# EAGLE board FET-Driver-Modul (EAGLE 7.5.0)
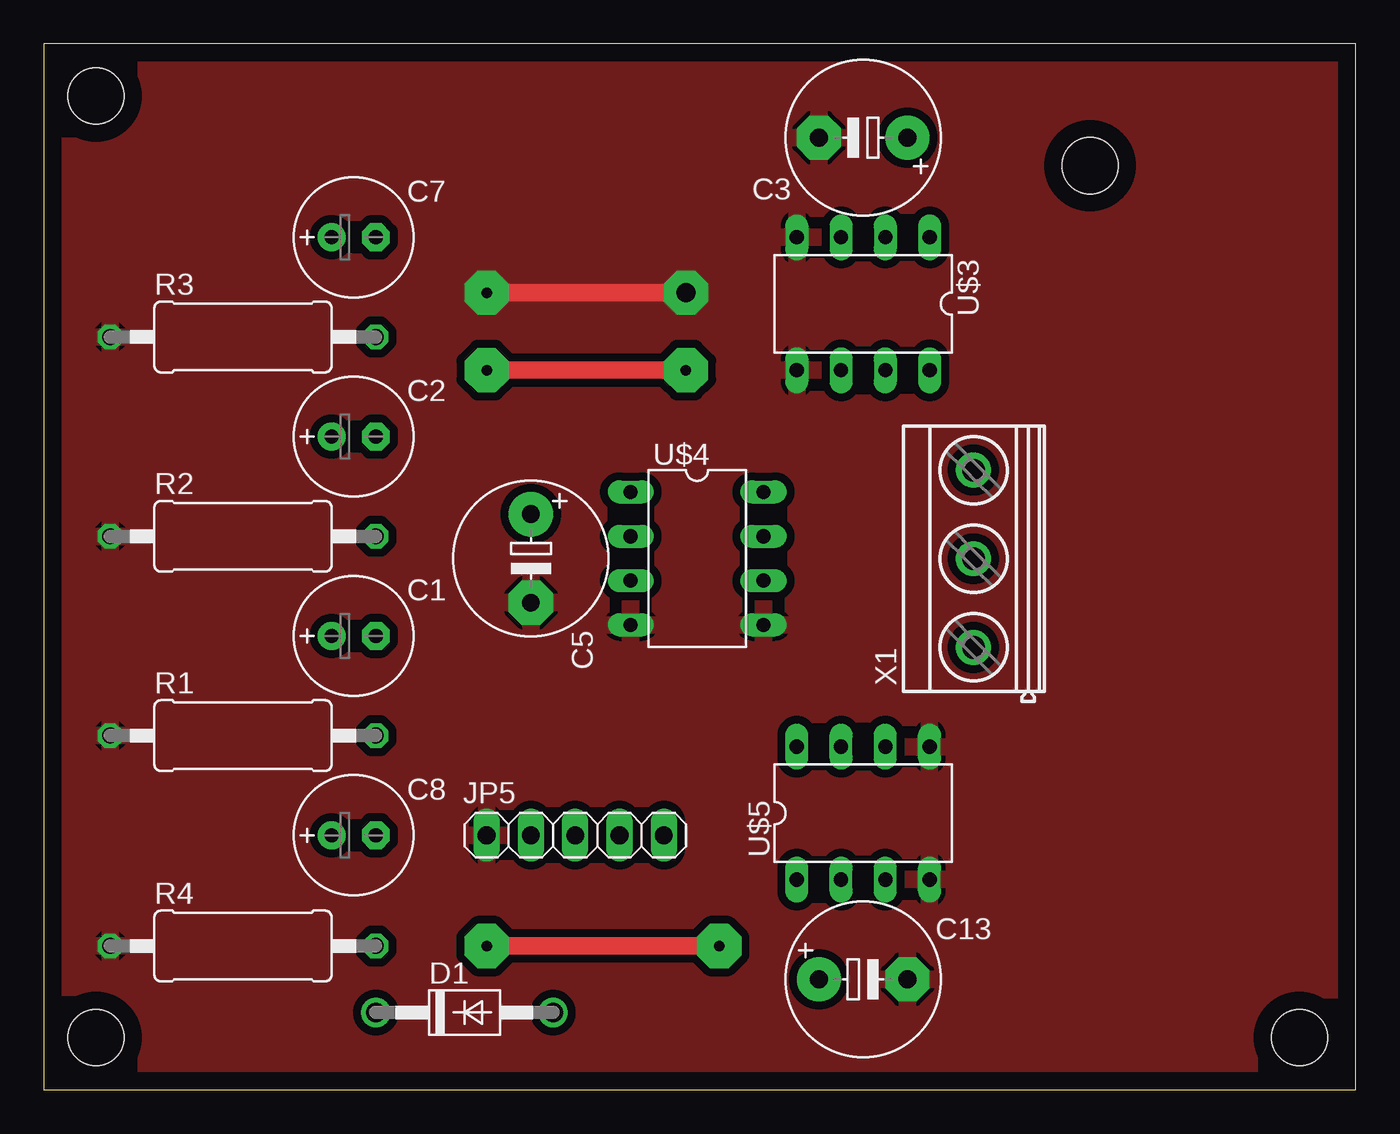
[diagram p0: board, top side]
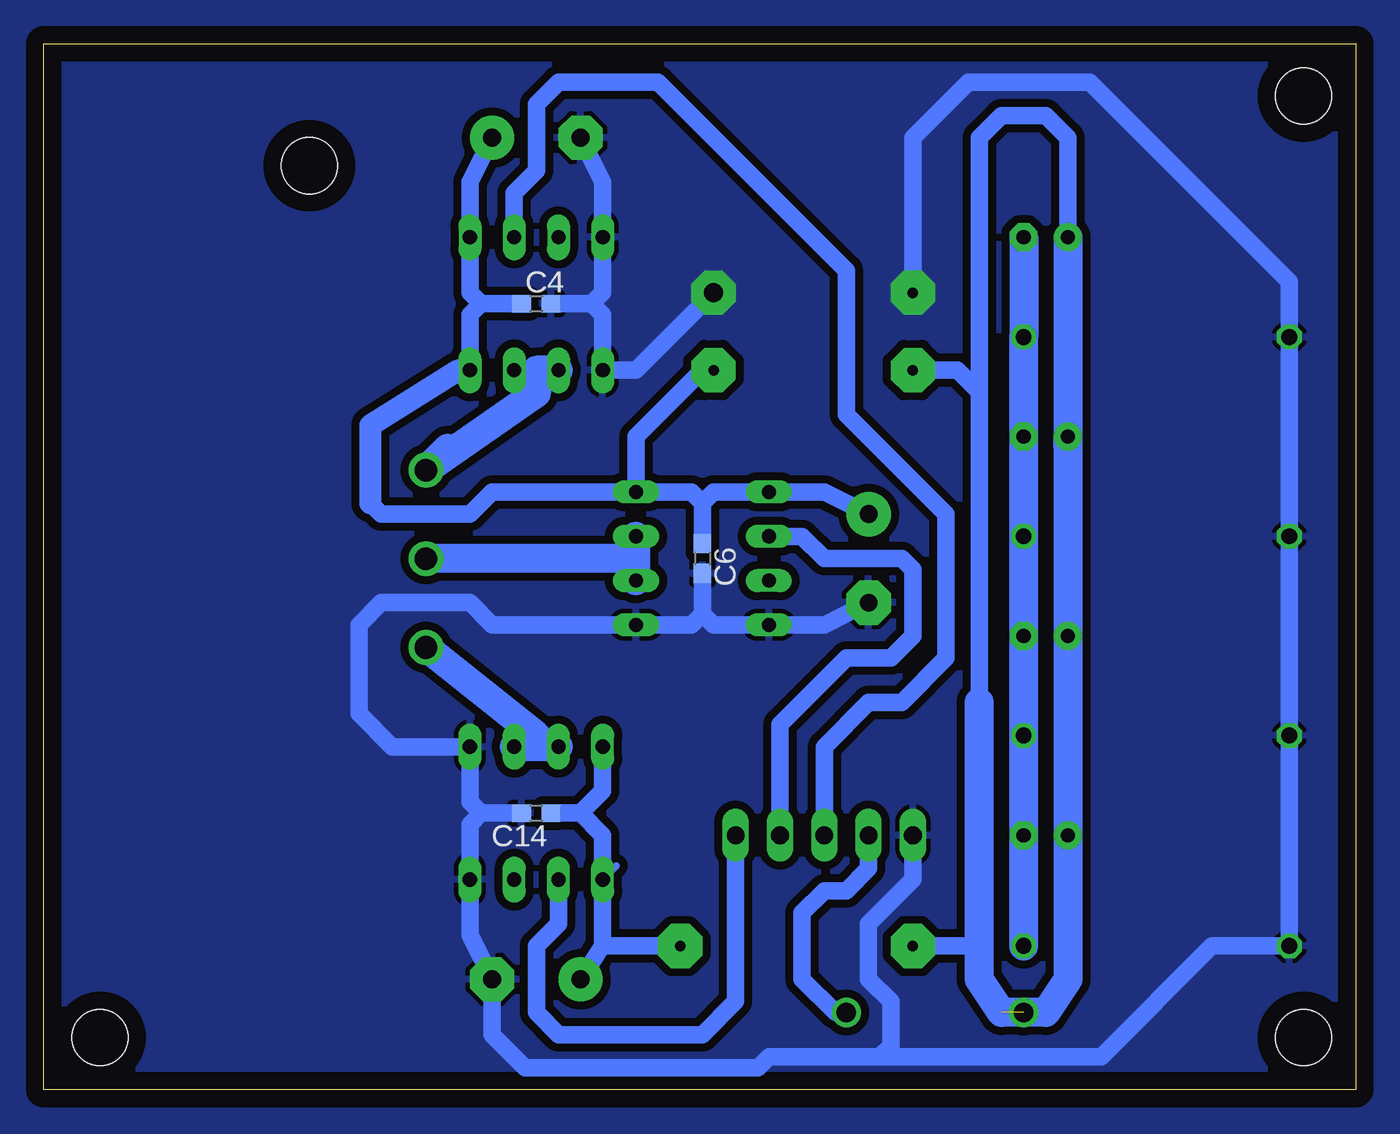
[diagram p1: board, bottom side, seen from below]

Size 75.24 x 60 mm. Coordinates in mm from the lower left corner, seen from the top.
Outline: 0,0 75.24,0 75.24,60 0,60 0,0
Copper layers (1*16): Top 0.035mm / dielectric 1.5mm / Bottom 0.035mm
Design rules "default *": minimum track width 10mil, minimum drill 24mil, track to track 18mil, track to pad 18mil, pad to pad 18mil, via to via 18mil, smd to smd 8mil, copper to edge 40mil, drill to drill 8mil, minimum pad ring 10mil, minimum via ring 8mil, stop-mask expansion 4mil, vias tented up to drill 0mil, thermal gap 10mil
Holes 3.2 mm at 3,57 3,3 72,3 60,53

## Footprints (pad centres in the part's own frame; a part is rotated, then mirrored left to right if it is on the bottom)
E2,5-7 = drill 0.813 pad 1.6: + -1.27,0 | drill 0.813 pad 1.6 octagon: - 1.27,0
E5-8,5 = drill 1.016 pad 2.54: + -2.54,0 | drill 1.016 pad 2.54 octagon: - 2.54,0
C0603 = smd 1.1 x 1: 1 -0.85,0; 2 0.85,0
DO41-10 = drill 1.118: A 5.08,0; C -5.08,0
1X05 = drill 1.016 long: 1 -5.08,0; 2 -2.54,0; 3 0,0; 4 2.54,0; 5 5.08,0
0411/15 = drill 0.914 octagon: 1 -7.62,0; 2 7.62,0
DIL-08 = drill 0.813 long: 1 -3.81,-3.81; 2 -1.27,-3.81; 3 1.27,-3.81; 4 3.81,-3.81; 5 3.81,3.81; 6 1.27,3.81; 7 -1.27,3.81; 8 -3.81,3.81
MKDSN1,5/3-5,08 = drill 1.3 pad 2: 1 -7.641,0.025; 2 -2.561,0.025; 3 2.519,0.025

## Placement (x,y rotation side)
C1  100 µF  [E2,5-7]  17.78,26.04 0 top
C2  100 µF  [E2,5-7]  17.78,37.47 0 top
C3  1µ  [E5-8,5]  46.99,54.61 180 top
C4  100 nF  [C0603]  46.99,45.09 0 bottom
C5  1µ  [E5-8,5]  27.94,30.48 270 top
C6  100 nF  [C0603]  37.47,30.48 270 bottom
C7  100 µF  [E2,5-7]  17.78,48.9 0 top
C8  100 µF  [E2,5-7]  17.78,14.61 0 top
C13  1µ  [E5-8,5]  46.99,6.35 0 top
C14  100 nF  [C0603]  46.99,15.88 180 bottom
D1  1N4004  [DO41-10]  24.13,4.45 0 top
JP5  [1X05]  30.48,14.61 0 top
R1  150  [0411/15]  11.43,20.32 0 top
R2  150  [0411/15]  11.43,31.75 0 top
R3  150  [0411/15]  11.43,43.18 0 top
R4  150  [0411/15]  11.43,8.26 0 top
U$3  MCP1407MCP1407-DIL08  [DIL-08]  46.99,45.09 180 top
U$4  MCP1407MCP1407-DIL08  [DIL-08]  37.47,30.48 270 top
U$5  MCP1407MCP1407-DIL08  [DIL-08]  46.99,15.88 0 top
X1  MKDSN1,5/3-5,08  [MKDSN1,5/3-5,08]  53.34,33.02 90 top

## Library data of the parts
C1-C3 C5 C7 C8 C13 = rcl
C4 C6 C14 R1-R4 = resistor
D1 = diode
JP5 = pinhead
U$3-U$5 = 0liver
X1 = con-phoenix-508

## Nets
GND: C3.- C4.2 C5.- C6.2 C13.- C14.2 JP5.1 R1.1 R2.1 R3.1 R4.1 U$3.4 U$3.5 U$4.4 U$4.5 U$5.4 U$5.5
N$1: JP5.4 U$4.2
N$2: C1.+ C2.+ C3.+ C4.1 C5.+ C6.1 C7.+ C8.+ C13.+ C14.1 D1.C U$3.1 U$3.8 U$4.1 U$4.8 U$5.1 U$5.8
N$3: JP5.5 U$5.2
N$4: C1.- C2.- C7.- C8.- R1.2 R2.2 R3.2 R4.2
N$5: JP5.3 U$3.2
N$6: D1.A JP5.2
N$30: U$4.6 U$4.7 X1.2
N$33: U$3.6 U$3.7 X1.3
N$35: U$5.6 U$5.7 X1.1

## Tracks (layer width: path | path; a pad name or v marks a point on that pad's centre or on a via)
GND  (via drill 0.6 pad 2.54, 1.1 pad 2.54)
  Top 1.016: v36.83,45.72 v25.4,45.72
  Bottom 1.016: C14.2 50.16,15.88 | 50.16,15.88 50.8,16.51 U$5.5 | 50.16,15.88 50.8,15.24 U$5.4 50.8,8.89 C13.- 49.53,3.17 47.62,1.27 34.29,1.27 33.66,1.91 31.11,1.91 | C4.2 43.81,45.09 | 43.81,45.09 43.18,44.45 U$3.5 41.27,41.27 v36.83,45.72 | 43.81,45.09 43.18,45.72 U$3.4 43.18,52.07 C3.- | R3.1 R4.1 8.26,8.26 14.61,1.91 27.3,1.91 | v25.4,45.72 25.4,54.61 22.23,57.78 15.24,57.78 3.81,46.35 R3.1 | R3.1 R2.1 R1.1 | 27.3,1.91 31.11,1.91 | 37.47,27.3 C6.2 37.47,27.3 | 37.47,27.3 38.1,26.67 | 38.1,26.67 U$4.5 | U$4.4 36.83,26.67 | 36.83,26.67 37.47,27.3 | U$4.4 30.48,26.67 | 30.48,26.67 C5.- 30.48,26.67 | U$4.5 49.53,26.67 | 49.53,26.67 50.8,27.94 | 50.8,27.94 55.88,27.94 | 55.88,27.94 57.15,26.67 | 57.15,26.67 57.15,21.59 | 57.15,21.59 55.24,19.68 | 55.24,19.68 U$5.5 | JP5.1 25.4,12.06 27.94,9.53 | 27.94,9.53 27.94,6.99 | 31.11,1.91 27.3,1.91 | 27.3,1.91 26.67,2.54 26.67,5.08 27.94,6.35 27.94,6.99 | 27.94,6.99 27.94,9.53 | 37.47,27.3 38.1,26.67 | 38.1,26.67 U$4.5 | U$4.4 36.83,26.67 | 36.83,26.67 37.47,27.3 | U$4.4 30.48,26.67 | U$4.5 49.53,26.67 | 49.53,26.67 50.8,27.94 | 50.8,27.94 55.88,27.94 | 55.88,27.94 57.15,26.67 | 57.15,26.67 57.15,21.59 | 57.15,21.59 55.24,19.68 | 55.24,19.68 U$5.5
  pour Bottom: -2.54,-3.17 78.11,-2.54 78.11,66.04 -2.54,65.41
  pour Top: -4.45,65.41 83.19,65.41 83.19,-3.81 -4.45,-3.81
N$1
  Bottom 1.016: U$4.2 31.75,31.75 30.48,30.48 26.04,30.48 25.4,29.84 25.4,26.04 26.04,25.4 26.67,24.77 29.21,24.77 33.02,20.95 JP5.4
N$2  (via drill 0.6 pad 2.54)  (1 unrouted)
  Top 1.016: v36.83,41.27 v25.4,41.27 | v25.4,8.26 v38.73,8.26
  Bottom 0.406: 42.39,12.85 U$5.1
  Bottom 1.016: C14.1 44.45,15.88 | 44.45,15.88 43.18,14.61 U$5.1 | 44.45,15.88 43.18,17.14 U$5.8 | U$5.1 43.18,8.26 | 43.18,8.26 C13.+ | C5.+ 30.48,34.29 U$4.1 34.29,34.29 36.83,34.29 37.47,33.66 | C4.1 50.16,45.09 | 50.16,45.09 50.8,45.72 U$3.1 50.8,52.07 C3.+ | U$3.8 50.8,44.45 50.16,45.09 | C6.1 37.47,33.66 | 37.47,33.66 38.1,34.29 U$4.8 | U$4.8 49.53,34.29 50.8,33.02 55.88,33.02 56.52,33.66 | v25.4,41.27 22.86,41.27 21.59,40.01 | v38.73,8.26 43.18,8.26 | 43.18,8.26 U$5.1 | 21.59,22.86 21.59,40.01 | v36.83,41.27 37.47,41.27 41.27,37.47 U$4.8 | 21.59,40.01 21.59,42.55 21.59,48.9 21.59,54.61 20.32,55.88 17.78,55.88 16.51,54.61 C7.+ | v25.4,8.26 21.59,8.26
  Bottom 1.27: U$3.8 51.44,41.27 56.52,38.1 56.52,33.66
  Bottom 1.676: C7.+ 16.51,42.55 C2.+ | C2.+ 16.51,36.83 C2.+ | C2.+ C1.+ C8.+ 16.51,6.35 17.78,4.45 20.32,4.45 21.59,6.35 21.59,8.26 21.59,22.23
N$3
  Bottom 1.016: U$5.2 45.72,9.53 46.99,8.26 46.99,4.45 45.72,3.17 37.47,3.17 35.56,5.08 JP5.5
N$4
  Bottom 1.016: R1.2 C1.-
  Bottom 1.676: R2.2 C1.- R1.2 C8.- R4.2 | R2.2 C2.- | R2.2 R3.2 C7.-
N$5
  Bottom 1.016: U$3.2 48.26,51.44 46.99,52.7 46.99,56.52 45.72,57.78 40.01,57.78 29.21,46.99 29.21,38.73 23.5,33.02 23.5,24.77 26.04,22.23 27.94,22.23 30.48,19.68 JP5.3
N$6
  Bottom 1.016: JP5.2 27.94,12.7 29.21,11.43 30.48,11.43 31.75,10.16 31.75,6.35 29.84,4.45 D1.A
N$16
  pour Bottom: -4.45,67.31 80.64,67.31 80.64,-5.08 -4.45,-4.45
N$30
  Bottom 1.676: U$4.7 U$4.6 41.27,29.84 41.91,30.48 53.29,30.48 X1.2
N$33
  Bottom 1.016: U$3.6 46.99,41.27 U$3.7
  Bottom 1.676: U$3.6 46.99,41.27 46.99,39.96 X1.3 52.07,36.78
N$35
  Bottom 1.676: U$5.7 U$5.6 47.62,19.68 46.99,20.32 X1.1